# Altium PCB PCB_BaseBoard.PcbDoc
Units mil, origin at the board's own origin, x right, y up, seen from the top; angles counter-clockwise.
Board outline 6000 x 4000 mil, 2 copper layers (Top Layer, Bottom Layer); 82 components, 96 nets, 318 pads, 0 vias.
Unrouted connection lines stored in the file: 197.
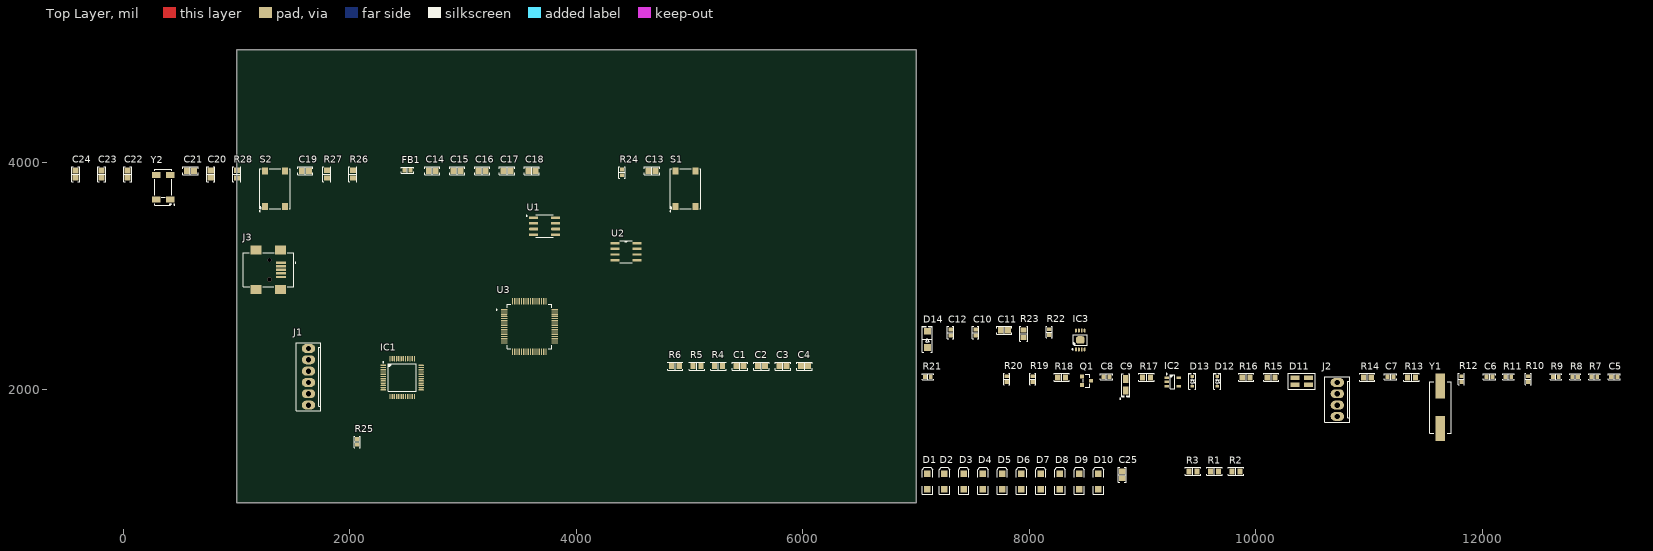
[diagram p0: Top Layer view]
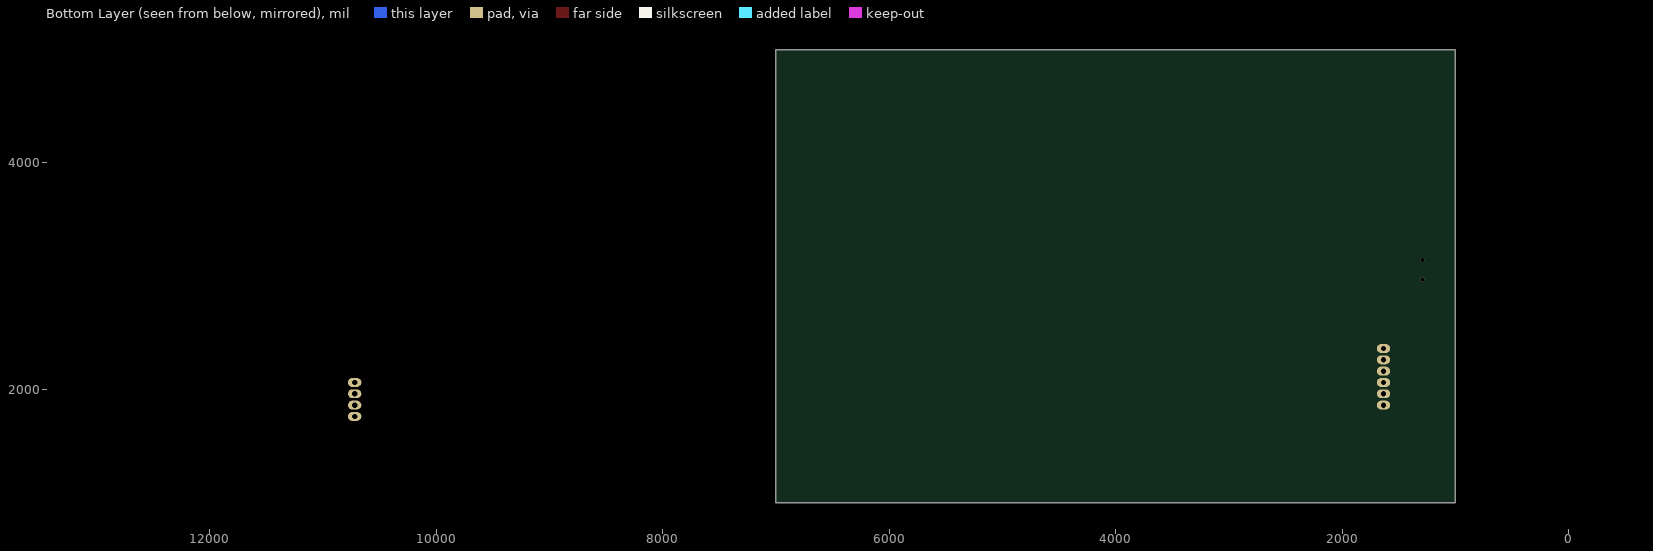
[diagram p1: Bottom Layer view, seen from below]

## Layer stack, top to bottom
Top Solder: solder mask 0.4, Solder Resist, Dk 3.5
Top Layer: signal copper 1.4
Dielectric 1: dielectric 12.6, FR-4, Dk 4.8
Bottom Layer: signal copper 1.4
Bottom Solder: solder mask 0.4, Solder Resist, Dk 3.5

## Board outline
1000,1000 7000,1000 7000,5000 1000,5000

## Design rules (kind name [scope] priority, off if disabled: settings)
Clearance [All] p1: gap=10 ignorepadtopadclearanceinfootprint=FALSE except(0: Arc-Hole Track-Hole SMDPad-Hole THPad-Hole Via-Hole Fill-Hole Poly-Hole Region-Hole Text-Hole)
PolygonConnect [All] p1: connectstyle=Relief reliefconductorwidth=10 reliefentries=4 polygonreliefangle="90 Angle" airgapwidth=10
RoomDefinition Designator_3 [InComponentClass('Designator')] p1: confinementstyle=ConfineIn formatcopy=TRUE lockcomponents=FALSE outline 5476.23,2932.4 11061.23,2932.4 11061.23,3572.4 5476.23,3572.4
RoomDefinition Designator_2 [InComponentClass('Designator')] p2: confinementstyle=ConfineIn formatcopy=TRUE lockcomponents=FALSE outline 985,1000 7005,1000 7005,4995 985,4995
RoomDefinition Designator_1 [InComponentClass('Designator')] p3: confinementstyle=ConfineIn formatcopy=TRUE lockcomponents=FALSE outline 6385,595 11970,595 11970,1235 6385,1235
RoomDefinition Designator [InComponentClass('Designator')] p4: confinementstyle=ConfineIn formatcopy=TRUE lockcomponents=FALSE outline 7215,3890 12800,3890 12800,4530 7215,4530
RoutingVias [All] p1: holewidth=28 width=50 viastyle="Through Hole" minholewidth=28 minwidth=50 maxholewidth=28 maxwidth=50
SolderMaskExpansion [All] p1: expansion=4 istentingtop=FALSE
Width [All] p1: maxlimit=10 minlimit=10 preferedwidth=10
30 further rules are at their usual default settings.

## Classes and differential pairs
net class PF[0..7]: PF0 PF1 PF4 PF5 PF6 PF7
net class PC[0..15]: PC0 PC1 PC2 PC3 PC4 PC5 PC6 PC7 PC8 PC9 PC10 PC11 PC12 PC13 PC14 PC15
net class PB[0..15]: PB0 PB1 PB2 PB3 PB4 PB5 PB6 PB7 PB8 PB9 PB10 PB11 PB12 PB13 PB14 PB15
net class PA[0..15]: PA0 PA1 PA2 PA3 PA4 PA5 PA6 PA7 PA8 PA9 PA10 PA11 PA12 PA13 PA14 PA15
component class Designator: C13 C14 C15 C16 C17 C18 C19 C20 C21 C22 C23 C24 FB1 R24 R25 R26 R27 R28 S1 S2 U3 Y2

## Components (designator, comment, footprint, x,y, rotation, side; value= is the part's Value field where it differs from the comment)
C1 "0.1µF" "CAP 0805_2012" 5445,2205 r0 top
C2 "0.1µF" "CAP 0805_2012" 5635,2205 r0 top
C3 "0.1µF" "CAP 0805_2012" 5825,2205 r0 top
C4 "0.1µF" "CAP 0805_2012" 6015,2205 r0 top
C5 "20pF" "CAP 0603_1608" 13165,2110 r0 top
C6 "20pF" "CAP 0603_1608" 12065,2110 r0 top
C7 "20pF" "CAP 0603_1608" 11190,2110 r0 top
C8 "1µF" "CAP 0603_1608" 8680,2110 r0 top
C9 "4.7µF" "CAP POL 1206_3216" 8850,2040 r90 top
C10 "1µF" "CAP 0603_1608" 7525,2500 r90 top
C11 "0.1µF" "CAP 0805_2012" 7780,2520 r0 top
C12 "1µF" "CAP 0603_1608" 7305,2500 r90 top
C13 "0.1µF" "CAP 0805_2012" 4668,3929.41 r0 top
C14 "0.1µF" "CAP 0805_2012" 2728,3929.41 r0 top
C15 "0.1µF" "CAP 0805_2012" 2948,3929.41 r0 top
C16 "0.1µF" "CAP 0805_2012" 3168,3929.41 r0 top
C17 "0.1µF" "CAP 0805_2012" 3388,3929.41 r0 top
C18 "0.1µF" "CAP 0805_2012" 3608,3929.41 r0 top
C19 "0.1µF" "CAP 0805_2012" 1608,3929.41 r0 top
C20 "4.3pF" "CAP 0805_2012" 773,3899.41 r90 top
C21 "4.7µF" "CAP 0805_2012" 593,3929.41 r0 top
C22 "4.3pF" "CAP 0805_2012" 38,3899.41 r90 top
C23 "2.2µF" "CAP 0805_2012" -192,3899.41 r90 top
C24 "2.2µF" "CAP 0805_2012" -422,3899.41 r90 top
C25 "10000pF" "CAP 0805_2012" 8820,1245 r90 top
D1 "LED2" 3.2X1.6X1.1 7100,1185 r90 top
D2 "LED2" 3.2X1.6X1.1 7250,1185 r90 top
D3 "LED2" 3.2X1.6X1.1 7420,1185 r90 top
D4 "LED2" 3.2X1.6X1.1 7590,1185 r90 top
D5 "LED2" 3.2X1.6X1.1 7760,1185 r90 top
D6 "LED2" 3.2X1.6X1.1 7930,1185 r90 top
D7 "LED2" 3.2X1.6X1.1 8100,1185 r90 top
D8 "LED2" 3.2X1.6X1.1 8270,1185 r90 top
D9 "LED2" 3.2X1.6X1.1 8440,1185 r90 top
D10 "LED2" 3.2X1.6X1.1 8610,1185 r90 top
D11 "APBL3025ESGC-F01" APBL3025ESGC-F01 10405,2100 r0 top
D12 "BAT60JFILM" SOD323 9660,2070 r90 top
D13 "BAT60JFILM" SOD323 9440,2070 r90 top
D14 "Yellow" "LED 1206_3216 YELLOW" 7100,2440 r90 top
FB1 "600 Ohms @ 100MHz" "FER 0603_1608" 2508,3934.41 r0 top
IC1 "STM32F103CBT6" "ST LQFP-48 7X7MM" 2462.68,2103.27 r0 top
IC2 "TPS76338DBVR" "TI SOT-23-5 DBV" 9265,2065 r0 top
IC3 "LT1965EMS8E-3.3#PBF" "LT MSOP-8 MS8E 3X3MM" 8450,2435 r90 top
J1 "0022272061" "MOLEX KK 0022272061" 1635,2110 r90 top
J2 "0022272041" "MOLEX KK 0022272041" 10720,1910 r90 top
J3 "1734035-2" CONN_1734035-2 1290,3055 r270 top
Q1 "MMSS8050-H-TP" "MCCSEMI SOT-23-3" 8505,2075 r0 top
R1 "10 kOhms" "RES 0805_2012" 9635,1275 r0 top
R2 "10 kOhms" "RES 0805_2012" 9825,1275 r0 top
R3 "10 kOhms" "RES 0805_2012" 9445,1275 r0 top
R4 "4.7 kOhms" "RES 0805_2012" 5255,2205 r0 top
R5 "10 kOhms" "RES 0805_2012" 5065,2205 r0 top
R6 "100 Ohms" "RES 0805_2012" 4875,2205 r0 top
R7 "100 kOhms" "RES 0603_1608" 12990,2110 r0 top
R8 "22 Ohms" "RES 0603_1608" 12820,2110 r0 top
R9 "22 Ohms" "RES 0603_1608" 12650,2110 r0 top
R10 "22 Ohms" "RES 0603_1608" 12405,2090 r90 top
R11 "22 Ohms" "RES 0603_1608" 12230,2110 r0 top
R12 "2.7 kOhms" "RES 0603_1608" 11815,2090 r90 top
R13 "4.7 kOhms" "RES 0805_2012" 11375,2105 r0 top
R14 "100 Ohms" "RES 0805_2012" 10985,2105 r0 top
R15 "100 Ohms" "RES 0805_2012" 10135,2105 r0 top
R16 "100 Ohms" "RES 0805_2012" 9915,2105 r0 top
R17 "10 kOhms" "RES 0805_2012" 9035,2105 r0 top
R18 "100 Ohms" "RES 0805_2012" 8285,2105 r0 top
R19 "1.5 kOhms" "RES 0603_1608" 8030,2090 r90 top
R20 "36 kOhms" "RES 0603_1608" 7800,2090 r90 top
R21 "100 kOhms" "RES 0603_1608" 7105,2110 r0 top
R22 "1 kOhms" "RES 0603_1608" 8175,2505 r90 top
R23 "4.7 kOhms" "RES 0805_2012" 7950,2490 r90 top
R24 "Value" "RES 0603_1608" 4403,3914.41 r90 top
R25 "Value" "RES 0603_1608" 2065,1535 r90 top
R26 "10 kOhms" "RES 0805_2012" 2028,3899.41 r90 top
R27 "4.7 kOhms" "RES 0805_2012" 1798,3899.41 r90 top
R28 "100 Ohms" "RES 0805_2012" 1003,3899.41 r90 top
S1 "B3S-1000P" "OMRON B3S-1000P" 4963,3769.41 r90 top
S2 "B3S-1000P" "OMRON B3S-1000P" 1338,3769.41 r90 top
U1 "TMP75CID" SOIC127P599X175-8N 3720,3440 r0 top
U2 "IRF9332PBF" SOIC127P600X175-8N 4438,3215 r0 top
U3 "STM32F072R8T6" QFP50P1200X1200X160-64N 3585,2555 r0 top
Y1 "8MHz" "ABRACON ABLS" 11630,1840 r90 top
Y2 "32.768kHz" "ABRACON ABS25" 353,3784.41 r90 top

## Footprints (in the part's own frame and the unit in brackets; to place one, negate y for a bottom-side part, rotate by r counter-clockwise, add the part's x,y. Pads: shape width x height; smd on the part's side, far side on the other; paste and mask are expansions set on the pad)
3.2X1.6X1.1 [mm] "SMT LED; 2 Flat Leads"
  rect 1.5x1.5 smd: 1(-1.75,0) 2(1.75,0)
  silkscreen extent -2.9,-1.15 3.2,1.15
"ABRACON ABLS" [mm] "Crystal, 2-Leads, Body 4.70x11.40mm, Pitch 8.80mm, IPC Medium Density"
  rect 5.6x2.1 smd: 1(-4.75,0) 2(4.75,0)
  silkscreen extent -5.77,-2.43 5.77,2.43, body extent -6.35,-2.35 6.35,2.35, height 4.2
"ABRACON ABS25" [mm]
  rect 1.3x1.9 smd: 1(-2.75,-1.6) 2(2.75,-1.6) 3(2.75,1.6) 4(-2.75,1.6)
  silkscreen extent -4.02,-2.61 4,1.9, body extent -4,-1.9 4,1.9, height 2.5
APBL3025ESGC-F01 [mm]
  rect 2x1 smd: 1(1.5,0) 2(-1.5,0) 3(1.5,-1.5) 4(-1.5,-1.5)
  silkscreen extent -3,-2.5 3,1
"CAP 0603_1608" [mm] "Chip Capacitor, 2-Leads, Body 1.60x0.80mm, IPC Medium Density"
  rect 0.9x1 smd: 1(-0.675,0) 2(0.675,0)
  silkscreen extent -1.4,-0.7 1.4,0.7, body extent -0.8,-0.41 0.8,0.41, height 0.82
"CAP 0805_2012" [mm] "Chip Capacitor, 2-Leads, Body 2.00x1.20mm, IPC Medium Density"
  rect 1.3x1.4 smd: 1(-0.8,0) 2(0.8,0)
  silkscreen extent -1.7,-0.9 1.7,0.9, body extent -1,-0.64 1,0.64, height 1.26
"CAP POL 1206_3216" [mm] "Molded Capacitor, 2-Leads, Body 3.20x1.6mm, IPC Medium Density"
  rect 1.8x1.23 smd: 1(-1.31,0) 2(1.31,0)
  silkscreen extent -3.22,-0.9 2.5,1.32, body extent -1.72,-0.85 1.71,0.85, height 1.7
CONN_1734035-2 [mm]
  rect 0.5x2.3 smd: 1(-1.6,2.6) 2(-0.8,2.6) 3(0,2.6) 4(0.8,2.6) 5(1.6,2.6)
  rect 2x2.5 smd: S1(-4.45,2.5) S2(4.45,2.5) S3(-4.45,-3) S4(4.45,-3)
  round 0.9 hole 0.9 unplated: ""(-2.2,0) ""(2.2,0)
  silkscreen extent -3.85,-5.9 3.85,5.95
"FER 0603_1608" [mm] "Chip Ferrite, 2-Leads, Body 1.60x0.80mm, IPC Medium Density"
  rect 0.9x1 smd: 1(-0.675,0) 2(0.675,0)
  silkscreen extent -1.4,-0.7 1.4,0.7, body extent -0.8,-0.41 0.8,0.41, height 0.82
"LED 1206_3216 YELLOW" [mm] "Chip Diode, 2-Leads, Body 3.13x1.55mm, IPC Medium Density"
  rect 1.5x1.6 smd: 1(-1.8,0) 2(1.8,0)
  silkscreen extent -2.92,-1.1 2.92,1.1, body extent -1.6,-0.8 1.6,0.8, height 0.9
"LT MSOP-8 MS8E 3X3MM" [mm] "MSOP, 8-Leads, Body 3.00x3.00mm, Pitch 0.65mm, IPC Medium Density"
  oval 0.89x0.42 smd: 1(-2.105,0.975) 2(-2.105,0.325) 3(-2.105,-0.325) 4(-2.105,-0.975) 5(2.105,-0.975) 6(2.105,-0.325) 7(2.105,0.325) 8(2.105,0.975)
  rrect50% 1.68x1.88 smd: 9(0,0)
  silkscreen extent -2.23,-1.55 1.15,1.86, body extent -2.46,-1.5 2.46,1.5, height 0.96
"MCCSEMI SOT-23-3" [mm] "SOT23, 3-Leads, Body 2.92x2.37mm, Pitch 0.95mm, IPC Medium Density"
  rect 0.9x0.8 smd: 1(-1,0.95) 2(-1,-0.95) 3(1,0)
  silkscreen extent -0.7,-1.45 0.7,1.45, body extent -1.16,-1.45 1.16,1.45, height 1.5
"MOLEX KK 0022272041" [mm]
  oval 2x3 hole 1.2: 1(-3.81,0) 2(-1.27,0) 3(1.27,0) 4(3.81,0)
  silkscreen extent -5.08,-2.79 5.08,2.79, body extent -5.08,-2.9 5.08,2.9, height 11.7
"MOLEX KK 0022272061" [mm]
  oval 2x3 hole 1.2: 1(-6.35,0) 2(-3.81,0) 3(-1.27,0) 4(1.27,0) 5(3.81,0) 6(6.35,0)
  silkscreen extent -7.62,-2.79 7.62,2.79, body extent -7.62,-2.9 7.62,2.9, height 11.7
"OMRON B3S-1000P" [mm] "B3S-1000P, 4 Pins, 6.6x6.6x4.3mm, 4.5mm Pitch"
  rect 1.55x1.3 smd: 1(-3.984,2.207) 2(3.966,2.207) 3(-3.984,-2.293) 4(3.966,-2.293)
  silkscreen extent -5.1,-3.45 4.49,3.45, body extent -4.51,-3.34 4.49,3.26, height 4.3
QFP50P1200X1200X160-64N [mm]
  rrect25% 1.47x0.28 smd: 1(-5.67,3.75) 2(-5.67,3.25) 3(-5.67,2.75) 4(-5.67,2.25) 5(-5.67,1.75) 6(-5.67,1.25) 7(-5.67,0.75) 8(-5.67,0.25) 9(-5.67,-0.25) 10(-5.67,-0.75) 11(-5.67,-1.25) 12(-5.67,-1.75) 13(-5.67,-2.25) 14(-5.67,-2.75) 15(-5.67,-3.25) 16(-5.67,-3.75) 33(5.67,-3.75) 34(5.67,-3.25) 35(5.67,-2.75) 36(5.67,-2.25) 37(5.67,-1.75) 38(5.67,-1.25) 39(5.67,-0.75) 40(5.67,-0.25) 41(5.67,0.25) 42(5.67,0.75) 43(5.67,1.25) 44(5.67,1.75) 45(5.67,2.25) 46(5.67,2.75) 47(5.67,3.25) 48(5.67,3.75)
  rrect25% 0.28x1.47 smd: 17(-3.75,-5.67) 18(-3.25,-5.67) 19(-2.75,-5.67) 20(-2.25,-5.67) 21(-1.75,-5.67) 22(-1.25,-5.67) 23(-0.75,-5.67) 24(-0.25,-5.67) 25(0.25,-5.67) 26(0.75,-5.67) 27(1.25,-5.67) 28(1.75,-5.67) 29(2.25,-5.67) 30(2.75,-5.67) 31(3.25,-5.67) 32(3.75,-5.67) 49(3.75,5.67) 50(3.25,5.67) 51(2.75,5.67) 52(2.25,5.67) 53(1.75,5.67) 54(1.25,5.67) 55(0.75,5.67) 56(0.25,5.67) 57(-0.25,5.67) 58(-0.75,5.67) 59(-1.25,5.67) 60(-1.75,5.67) 61(-2.25,5.67) 62(-2.75,5.67) 63(-3.25,5.67) 64(-3.75,5.67)
  silkscreen extent -7.44,-5 5,5
"RES 0603_1608" [mm] "Chip Resistor, 2-Leads, Body 1.60x0.80mm, IPC Medium Density"
  rect 0.85x0.95 smd: 1(-0.65,0) 2(0.65,0)
  silkscreen extent -1.27,-0.7 1.27,0.7, body extent -0.8,-0.4 0.8,0.4, height 0.45
"RES 0805_2012" [mm] "Chip Resistor, 2-Leads, Body 2.00x1.25mm, IPC Medium Density"
  rect 1.15x1.35 smd: 1(-0.875,0) 2(0.875,0)
  silkscreen extent -1.7,-0.9 1.7,0.9, body extent -1,-0.62 1,0.63, height 0.6
SOD323 [mm] "SOD, 2-Leads, Body 1.25x2.50mm, IPC Medium Density"
  rect 0.625x0.83 smd: 1(-1.112,0) 2(1.112,0)
  silkscreen extent -1.78,-0.8 1.78,0.8, body extent -1.36,-0.62 1.36,0.62, height 1.05
SOIC127P599X175-8N [mm]
  rrect25% 1.97x0.6 smd: 1(-2.47,1.905) 2(-2.47,0.635) 3(-2.47,-0.635) 4(-2.47,-1.905) 5(2.47,-1.905) 6(2.47,-0.635) 7(2.47,0.635) 8(2.47,1.905)
  silkscreen extent -4.14,-2.52 1.95,2.52
SOIC127P600X175-8N [mil]
  rect 78x20 smd: 1(-97,75) 2(-97,25) 3(-97,-25) 4(-97,-75) 5(97,-75) 6(97,-25) 7(97,25) 8(97,75)
  silkscreen extent -56,-98 56,98
"ST LQFP-48 7X7MM" [mm] "LQFP, 48-Leads, Body 7.00x7.00mm, Pitch 0.50mm, IPC Medium Density"
  oval 1.2x0.3 smd: 1(-4.25,2.75) 2(-4.25,2.25) 3(-4.25,1.75) 4(-4.25,1.25) 5(-4.25,0.75) 6(-4.25,0.25) 7(-4.25,-0.25) 8(-4.25,-0.75) 9(-4.25,-1.25) 10(-4.25,-1.75) 11(-4.25,-2.25) 12(-4.25,-2.75) 25(4.25,-2.75) 26(4.25,-2.25) 27(4.25,-1.75) 28(4.25,-1.25) 29(4.25,-0.75) 30(4.25,-0.25) 31(4.25,0.25) 32(4.25,0.75) 33(4.25,1.25) 34(4.25,1.75) 35(4.25,2.25) 36(4.25,2.75)
  oval 0.3x1.2 smd: 13(-2.75,-4.25) 14(-2.25,-4.25) 15(-1.75,-4.25) 16(-1.25,-4.25) 17(-0.75,-4.25) 18(-0.25,-4.25) 19(0.25,-4.25) 20(0.75,-4.25) 21(1.25,-4.25) 22(1.75,-4.25) 23(2.25,-4.25) 24(2.75,-4.25) 37(2.75,4.25) 38(2.25,4.25) 39(1.75,4.25) 40(1.25,4.25) 41(0.75,4.25) 42(0.25,4.25) 43(-0.25,4.25) 44(-0.75,4.25) 45(-1.25,4.25) 46(-1.75,4.25) 47(-2.25,4.25) 48(-2.75,4.25)
  silkscreen extent -4.37,-3.1 3.1,3.57, body extent -4.51,-4.51 4.51,4.51, height 1.55
"TI SOT-23-5 DBV" [mm] "SOT23, 5-Leads, Body 2.90x2.80mm, Pitch 0.95mm, IPC Medium Density"
  rect 1x0.55 smd: 1(-1.35,0.95) 2(-1.35,0) 3(-1.35,-0.95) 4(1.35,-0.95) 5(1.35,0.95)
  silkscreen extent -1.47,-1.55 0.5,1.9, body extent -1.44,-1.43 1.39,1.48, height 1.5

## Part data
C1 C2 C3 C4 C11 C13 C14 C15 C16 C17 C18 C19: library part AC0805KKX8R9BB104, "CAP CER 0805 10% X8R 50V 100NF", Device Package="0805 (2012 Metric)", Manufacturer=Yageo, Operating Temperature="-55°C ~ 150°C", Ratings=AEC-Q200, Supplier Part Number 1=311-4624-1-ND, Temperature Coefficient=X8R, Tolerance=±10%, Voltage - Rated=50V, Applications=Automotive, Capacitance=0.1µF, ComponentLink1Description=Datasheet, ComponentLink1URL=http://www.yageo.com/documents/recent/AC0805KKX8R9BB104.pdf, ComponentLink2Description="DigiKey Link", ComponentLink2URL=http://digikey.com/product-detail/en/yageo/AC0805KKX8R9BB104/311-4624-1-ND/9699550, LastUpdated="02/09/2020 01:04:20", Lifecycle Status=Active, Minimum Order=1, Mounting Type="Surface Mount, MLCC", Package / Case="0805 (2012 Metric)", Packaging=TapeAndReel, Part Number=AC0805KKX8R9BB104, Part Status=Active, PartId=14076, Price=0.06, Series=AC, Size / Dimension="0.079\" L x 0.049\" W (2.00mm x 1.25mm)", Supplier 1=DigiKey, Thickness (Max)="0.057\" (1.45mm)"
C5 C6 C7: library part 06033A200FAT2A, "CAP CER 20PF 25V NP0 0603", Device Package="0603 (1608 Metric)", Manufacturer="AVX Corporation", Operating Temperature="-55°C ~ 125°C", Supplier Part Number 1=478-11801-1-ND, Temperature Coefficient="C0G, NP0", Tolerance=±1%, Voltage - Rated=25V, Applications="General Purpose", Capacitance=20pF, ComponentLink1Description=Datasheet, ComponentLink1URL=http://datasheets.avx.com/C0GNP0-Dielectric.pdf, ComponentLink2Description="DigiKey Link", ComponentLink2URL=http://digikey.com/product-detail/en/avx-corporation/06033A200FAT2A/478-11801-1-ND/8573437, LastUpdated="02/09/2020 01:03:34", Lifecycle Status=Active, Minimum Order=1, Mounting Type="Surface Mount, MLCC", Package / Case="0603 (1608 Metric)", Packaging=TapeAndReel, Part Number=06033A200FAT2A, Part Status=Active, PartId=3360, Price=0.10, Series=-, Size / Dimension="0.063\" L x 0.032\" W (1.60mm x 0.81mm)", Supplier 1=DigiKey, Thickness (Max)="0.035\" (0.90mm)"
C8 C10 C12: library part C0603C105K8PACTU, "CAP CER 1UF 10V X5R 0603", Device Package="0603 (1608 Metric)", Manufacturer=KEMET, Operating Temperature="-55°C ~ 85°C", Supplier Part Number 1=399-3118-1-ND, Temperature Coefficient=X5R, Tolerance=±10%, Voltage - Rated=10V, Applications="General Purpose", Capacitance=1µF, ComponentLink1Description=Datasheet, ComponentLink1URL=https://api.kemet.com/component-edge/download/datasheet/C0603C105K8PACTU.pdf, ComponentLink2Description="DigiKey Link", ComponentLink2URL=http://digikey.com/product-detail/en/kemet/C0603C105K8PACTU/399-3118-1-ND/551623, LastUpdated="02/09/2020 01:03:23", Lifecycle Status=Active, Minimum Order=1, Mounting Type="Surface Mount, MLCC", Package / Case="0603 (1608 Metric)", Packaging=TapeAndReel, Part Number=C0603C105K8PACTU, Part Status=Active, PartId=9480, Price=0.01, Series="SMD Comm X5R", Size / Dimension="0.063\" L x 0.031\" W (1.60mm x 0.80mm)", Supplier 1=DigiKey, Thickness (Max)="0.035\" (0.90mm)"
C9: library part T495A475K010ATE1K2, "CAP TANT 4.7UF 10% 10V 1206", Device Package="1206 (3216 Metric)", ESR (Equivalent Series Resistance)="1.2Ohm @ 100kHz", Lifetime @ Temp.="2000 Hrs @ 125°C", Manufacturer=KEMET, Manufacturer Size Code=A, Operating Temperature="-55°C ~ 125°C", Supplier Part Number 1=399-18814-1-ND, Tolerance=±10%, Voltage - Rated=10V, Capacitance=4.7µF, ComponentLink1Description=Datasheet, ComponentLink1URL=https://api.kemet.com/component-edge/download/datasheet/T495A475K010ATE1K2.pdf, ComponentLink2Description="DigiKey Link", ComponentLink2URL=http://digikey.com/product-detail/en/kemet/T495A475K010ATE1K2/399-18814-1-ND/9642349, Features="General Purpose", Height - Seated (Max)="0.071\" (1.80mm)", LastUpdated="02/09/2020 01:15:59", Lifecycle Status=Active, Minimum Order=1, Mounting Type="Surface Mount", Package / Case="1206 (3216 Metric)", Packaging=TapeAndReel, Part Number=T495A475K010ATE1K2, Part Status=Active, PartId=115, Price=0.49, Series=T495, Size / Dimension="0.126\" L x 0.063\" W (3.20mm x 1.60mm)", Supplier 1=DigiKey, Type=Molded
C20 C22: library part 08051A4R3CAT2A, "CAP CER 4.3PF 100V NP0 0805", Device Package="0805 (2012 Metric)", Manufacturer="AVX Corporation", Operating Temperature="-55°C ~ 125°C", Supplier Part Number 1=478-10404-1-ND, Temperature Coefficient="C0G, NP0", Tolerance=±0.25pF, Voltage - Rated=100V, Applications="General Purpose", Capacitance=4.3pF, ComponentLink1Description=Datasheet, ComponentLink1URL=http://datasheets.avx.com/C0GNP0-Dielectric.pdf, ComponentLink2Description="DigiKey Link", ComponentLink2URL=http://digikey.com/product-detail/en/avx-corporation/08051A4R3CAT2A/478-10404-1-ND/6797329, LastUpdated="02/09/2020 01:04:08", Lifecycle Status=Active, Minimum Order=1, Mounting Type="Surface Mount, MLCC", Package / Case="0805 (2012 Metric)", Packaging=TapeAndReel, Part Number=08051A4R3CAT2A, Part Status=Active, PartId=17882, Price=0.04, Series=-, Size / Dimension="0.079\" L x 0.049\" W (2.01mm x 1.25mm)", Supplier 1=DigiKey, Thickness (Max)="0.037\" (0.94mm)"
C21: library part TMK212BBJ475KGHT, "CAP CER 4.7UF 25V X5R 0805", Device Package="0805 (2012 Metric)", Manufacturer="Taiyo Yuden", Operating Temperature="-55°C ~ 85°C", Ratings=AEC-Q200, Supplier Part Number 1=587-3713-1-ND, Temperature Coefficient=X5R, Tolerance=±10%, Voltage - Rated=25V, Applications=Automotive, Capacitance=4.7µF, ComponentLink1Description=Datasheet, ComponentLink1URL=https://www.yuden.co.jp/productdata/catalog/mlcc_all_hq_e.pdf, ComponentLink2Description="DigiKey Link", ComponentLink2URL=http://digikey.com/product-detail/en/taiyo-yuden/TMK212BBJ475KGHT/587-3713-1-ND/4811183, LastUpdated="02/09/2020 01:04:32", Lifecycle Status=Active, Minimum Order=1, Mounting Type="Surface Mount, MLCC", Package / Case="0805 (2012 Metric)", Packaging=TapeAndReel, Part Number=TMK212BBJ475KGHT, Part Status=Active, PartId=8142, Price=0.07, Series=M, Size / Dimension="0.079\" L x 0.049\" W (2.00mm x 1.25mm)", Supplier 1=DigiKey, Thickness (Max)="0.057\" (1.45mm)"
C23 C24: library part CL21F225ZOFNNNE, "CAP CER 2.2UF 16V Y5V 0805", Device Package="0805 (2012 Metric)", Manufacturer="Samsung Electro-Mechanics", Operating Temperature="-30°C ~ 85°C", Supplier Part Number 1=1276-3016-1-ND, Temperature Coefficient="Y5V (F)", Tolerance="-20%, +80%", Voltage - Rated=16V, Applications="General Purpose", Capacitance=2.2µF, ComponentLink1Description=Datasheet, ComponentLink1URL=http://www.samsungsem.com/kr/support/product-search/mlcc/CL21F225ZOFNNNE.jsp, ComponentLink2Description="DigiKey Link", ComponentLink2URL=http://digikey.com/product-detail/en/samsung-electro-mechanics/CL21F225ZOFNNNE/1276-3016-1-ND/3891102, LastUpdated="02/09/2020 01:04:16", Lifecycle Status=Active, Minimum Order=1, Mounting Type="Surface Mount, MLCC", Package / Case="0805 (2012 Metric)", Packaging=TapeAndReel, Part Number=CL21F225ZOFNNNE, Part Status=Active, PartId=15359, Price=0.03, Series=CL, Size / Dimension="0.079\" L x 0.049\" W (2.00mm x 1.25mm)", Supplier 1=DigiKey, Thickness (Max)="0.053\" (1.35mm)"
C25: library part C0805C103K1RECAUTO, "CAP CER 0805 10NF 100V X7R 10%", Device Package="0805 (2012 Metric)", Manufacturer=KEMET, Operating Temperature="-55°C ~ 125°C", Ratings=AEC-Q200, Supplier Part Number 1=399-17889-1-ND, Temperature Coefficient=X7R, Tolerance=±10%, Voltage - Rated=100V, Applications="Automotive, ESD Protection", Capacitance=10000pF, ComponentLink1Description=Datasheet, ComponentLink1URL=https://api.kemet.com/component-edge/download/datasheet/C0805C103K1RECAUTO.pdf, ComponentLink2Description="DigiKey Link", ComponentLink2URL=http://digikey.com/product-detail/en/kemet/C0805C103K1RECAUTO/399-17889-1-ND/8640556, LastUpdated="02/09/2020 01:04:15", Lifecycle Status=Active, Minimum Order=1, Mounting Type="Surface Mount, MLCC", Package / Case="0805 (2012 Metric)", Packaging=TapeAndReel, Part Number=C0805C103K1RECAUTO, Part Status=Active, PartId=15732, Price=0.05, Series="ESD SMD Auto X7R", Size / Dimension="0.079\" L x 0.049\" W (2.00mm x 1.25mm)", Supplier 1=DigiKey, Thickness (Max)="0.035\" (0.88mm)"
D1 D2 D3 D4 D5 D6 D7 D8 D9 D10: "Typical RED, GREEN, YELLOW, AMBER GaAs LED", LatestRevisionDate=17-Jul-2002, LatestRevisionNote="Re-released for DXP Platform.", PackageDescription="SM LED; 2 Flat Leads", PackageReference=3.2X1.6X1.1, PackageVersion=Feb-2002, Published=8-Jun-2000, Publisher="Altium Limited"
D11: "Green, Red 568nm Green, 617nm Red LED Indication - Discrete 2.2V Green, 2V Red 4-SMD, No Lead", Package="SMD-4 Kingbright", Check_prices=https://www.snapeda.com/parts/APBL3025ESGC-F01/Kingbright/view-part/2685601/?ref=eda, Digi-Key_Part_Number=754-1078-1-ND, MF=Kingbright, MP=APBL3025ESGC-F01, Purchase-URL=https://pricing.snapeda.com/search/part/APBL3025ESGC-F01/?ref=eda, SnapEDA_Link=https://www.snapeda.com/parts/APBL3025ESGC-F01/Kingbright/view-part/2685601/?ref=snap
D12 D13: "DIODE SCHOTTKY 10V 3A SOD323", Current - Average Rectified (Io)="3A (DC)", Current - Reverse Leakage @ Vr="6µA @ 10V", Manufacturer=STMicroelectronics, Operating Temperature - Junction="150°C (Max)", Package / Case="SC-76, SOD-323", Supplier Device Package=SOD-323, Supplier Part Number 1=497-3707-1-ND, Voltage - DC Reverse (Vr) (Max)=10V, Voltage - Forward (Vf) (Max) @ If="580mV @ 1A", ComponentLink1Description=Datasheet, ComponentLink1URL=http://www.st.com/content/ccc/resource/technical/document/datasheet/3d/d2/27/1d/20/e3/4d/48/CD00001944.pdf/files/CD00001944.pdf/jcr:content/translations/en.CD00001944.pdf, ComponentLink2Description="DigiKey Link", ComponentLink2URL=http://digikey.com/product-detail/en/stmicroelectronics/BAT60JFILM/497-3707-1-ND/686425, Diode Type=Schottky, LastUpdated="02/09/2020 01:27:27", Lifecycle Status=Active, Minimum Order=1, Mounting Type="Surface Mount", Packaging=TapeAndReel, Part Number=BAT60JFILM, Part Status=Active, PartId=3091, Price=0.05, Series=-, Speed="Fast Recovery =< 500ns, > 200mA (Io)", Supplier 1=DigiKey
D14: library part 5990240007F, "LED YELLOW 1206 SMD", Current - Test=20mA, Device Package="1206 (3216 Metric)", Lens Color=0.80mm, Manufacturer=Dialight, Millicandela Rating=126mcd, Supplier Device Package=1206, Supplier Part Number 1=350-4363-1-ND, Voltage - Forward (Vf) (Typ)=2.1V, Color=Yellow, ComponentLink1Description=Datasheet, ComponentLink1URL=http://www.dialightsignalsandcomponents.com/Assets/Brochures_And_Catalogs/Indication/CBI_SMD_new/Dialight_CBI_data_599-1206_Apr2018.pdf, ComponentLink2Description="DigiKey Link", ComponentLink2URL=http://digikey.com/product-detail/en/dialight/5990240007F/350-4363-1-ND/9385469, Configuration=Standard, Height (Max)=0.80mm, LastUpdated="02/09/2020 01:21:26", Lens Size="2.00mm x 1.60mm", Lens Style="Rectangle with Flat Top", Lifecycle Status=Active, Minimum Order=1, Mounting Type="Surface Mount", Package / Case="1206 (3216 Metric)", Packaging=TapeAndReel, Part Number=5990240007F, Part Status=Active, PartId=1, Price=0.07, Series=599, Size / Dimension="3.20mm L x 1.60mm W", Supplier 1=DigiKey, Viewing Angle=140°, Wavelength - Dominant=590nm
FB1: library part BLM18DN601SZ1D, "FERRITEBEAD SMD Z100MHZ=600OHM 7", Current Rating (Max)=700mA, Device Package="0603 (1608 Metric)", Manufacturer="Murata Electronics", Operating Temperature="-55°C ~ 125°C", Ratings=AEC-Q200, Supplier Part Number 1=490-18575-1-ND, ComponentLink1Description=Datasheet, ComponentLink1URL=https://www.murata.com/en-us/api/pdfdownloadapi?cate=luNoiseSupprFilteChipFerriBead&partno=BLM18DN601SZ1%23, ComponentLink2Description="DigiKey Link", ComponentLink2URL=http://digikey.com/product-detail/en/murata-electronics/BLM18DN601SZ1D/490-18575-1-ND/10135586, Height (Max)="0.037\" (0.95mm)", Impedance @ Frequency="600 Ohms @ 100MHz", LastUpdated="02/09/2020 01:18:18", Lifecycle Status=Active, Minimum Order=1, Mounting Type="Surface Mount", Number of Lines=1, Package / Case="0603 (1608 Metric)", Packaging=TapeAndReel, Part Number=BLM18DN601SZ1D, Part Status=Active, PartId=783, Price=0.05, Series="EMIFIL®, BLM18", Size / Dimension="0.063\" L x 0.031\" W (1.60mm x 0.80mm)", Supplier 1=DigiKey
IC1: "IC MCU 32BIT 128KB FLASH 48LQFP", Device Package=48-LQFP, Manufacturer=STMicroelectronics, Operating Temperature="-40°C ~ 85°C (TA)", Supplier Part Number 1=497-6288-ND, Voltage - Supply (Vcc/Vdd)="2V ~ 3.6V", ComponentLink1Description=Datasheet, ComponentLink1URL=https://www.st.com/resource/en/datasheet/stm32f103cb.pdf, ComponentLink2Description="DigiKey Link", ComponentLink2URL=http://digikey.com/product-detail/en/stmicroelectronics/STM32F103CBT6/497-6288-ND/1754420, Connectivity="CANbus, I²C, IrDA, LINbus, SPI, UART/USART, USB", Core Processor="ARM® Cortex®-M3", Core Size=32-Bit, Data Converters="A/D 10x12b", LastUpdated="24/05/2020 22:49:18", Lifecycle Status=Active, Minimum Order=1, Mounting Type="Surface Mount", Number of I/O=37, Oscillator Type=Internal, Package / Case=48-LQFP, Packaging=Tray, Part Number=STM32F103CBT6, Part Status=Active, PartId=194, Peripherals="DMA, Motor Control PWM, PDR, POR, PVD, PWM, Temp Sensor, WDT", Price=5.25, Program Memory Size="128KB (128K x 8)", Program Memory Type=FLASH, RAM Size="20K x 8", Series=STM32F1, Speed=72MHz, Supplier 1=DigiKey
IC2: "IC REG LINEAR 3.8V 150MA SOT23-5", Current - Output=150mA, Current - Quiescent (Iq)=100µA, Current - Supply (Max)=140µA, Manufacturer="Texas Instruments", Operating Temperature="-40°C ~ 125°C", Package / Case="SC-74A, SOT-753", Supplier Device Package=SOT-23-5, Supplier Part Number 1=296-11022-1-ND, Voltage - Input (Max)=10V, Voltage - Output (Min/Fixed)=3.8V, ComponentLink1Description=Datasheet, ComponentLink1URL=http://www.ti.com/general/docs/suppproductinfo.tsp?distId=10&gotoUrl=http%3A%2F%2Fwww.ti.com%2Flit%2Fgpn%2Ftps763, ComponentLink2Description="DigiKey Link", ComponentLink2URL=http://digikey.com/product-detail/en/texas-instruments/TPS76338DBVR/296-11022-1-ND/381505, Control Features=Enable, LastUpdated="02/09/2020 01:24:38", Lifecycle Status=Active, Minimum Order=1, Mounting Type="Surface Mount", Number of Regulators=1, Output Configuration=Positive, Output Type=Fixed, Packaging=TapeAndReel, Part Number=TPS76338DBVR, Part Status=Active, Price=0.33, Protection Features="Over Current, Over Temperature, Reverse Polarity", PSRR="60dB (1kHz)", Series=-, Supplier 1=DigiKey
IC3: "IC REG LINEAR 3.3V 1.1A 8MSOP", Current - Output=1.1A, Current - Quiescent (Iq)=1.1mA, Current - Supply (Max)=40mA, Manufacturer="Linear Technology/Analog Devices", Operating Temperature="-40°C ~ 125°C", Package / Case="8-TSSOP, 8-MSOP (0.118\", 3.00mm Width) Exposed Pad", Supplier Device Package=8-MSOP-EP, Supplier Part Number 1=LT1965EMS8E-3.3#PBF-ND, Voltage - Input (Max)=20V, Voltage - Output (Min/Fixed)=3.3V, Voltage Dropout (Max)="0.49V @ 1.1A", ComponentLink1Description=Datasheet, ComponentLink1URL=http://www.linear.com/docs/25320, ComponentLink2Description="DigiKey Link", ComponentLink2URL=http://digikey.com/product-detail/en/linear-technology-analog-devices/LT1965EMS8E-3.3-PBF/LT1965EMS8E-3.3-PBF-ND/2074395, Control Features=Enable, LastUpdated="02/09/2020 01:24:49", Lifecycle Status=Active, Minimum Order=1, Mounting Type="Surface Mount", Number of Regulators=1, Output Configuration=Positive, Output Type=Fixed, Packaging=Tube, Part Number=LT1965EMS8E-3.3#PBF, Part Status=Active, Price=4.83, Protection Features="Over Current, Over Temperature, Reverse Polarity", PSRR="75dB (120Hz)", Series=-, Supplier 1=DigiKey
J1: "CONN HEADER VERT 6POS 2.54MM", Insulation Color=Natural, Manufacturer=Molex, Material Flammability Rating="UL94 V-0", Supplier Part Number 1=WM4115-ND, ComponentLink1Description=Datasheet, ComponentLink1URL=https://www.molex.com/pdm_docs/sd/022272061_sd.pdf, ComponentLink2Description="DigiKey Link", ComponentLink2URL=http://digikey.com/product-detail/en/molex/0022272061/WM4115-ND/1130581, Connector Type=Header, Contact Finish - Mating=Tin, Contact Finish - Post=Tin, Contact Finish Thickness - Mating="100.0µin (2.54µm)", Contact Length - Mating="0.295\" (7.49mm)", Contact Length - Post="0.140\" (3.56mm)", Contact Material=Brass, Contact Shape=Square, Contact Type="Male Pin", Fastening Type="Friction Lock", Insulation Height="0.461\" (11.70mm)", Insulation Material="Polyamide (PA), Nylon", LastUpdated="12/01/2020 23:52:24", Lifecycle Status=Active, Minimum Order=1, Mounting Type="Through Hole", Number of Positions=6, Number of Positions Loaded=All, Number of Rows=1, Overall Contact Length="0.560\" (14.22mm)", Packaging=Bulk, Part Number=0022272061, Part Status=Active, PartId=80, Pitch - Mating="0.100\" (2.54mm)", Price=0.49, Series="KK 6410", Shrouding="Shrouded - 1 Wall", Style="Board to Cable/Wire", Supplier 1=DigiKey, Termination=Solder
J2: "CONN HEADER VERT 4POS 2.54MM", Insulation Color=Natural, Manufacturer=Molex, Material Flammability Rating="UL94 V-0", Supplier Part Number 1=WM4113-ND, ComponentLink1Description=Datasheet, ComponentLink1URL=https://www.molex.com/pdm_docs/sd/022272041_sd.pdf, ComponentLink2Description="DigiKey Link", ComponentLink2URL=http://digikey.com/product-detail/en/molex/0022272041/WM4113-ND/1130579, Connector Type=Header, Contact Finish - Mating=Tin, Contact Finish - Post=Tin, Contact Finish Thickness - Mating="100.0µin (2.54µm)", Contact Length - Mating="0.295\" (7.49mm)", Contact Length - Post="0.140\" (3.56mm)", Contact Material=Brass, Contact Shape=Square, Contact Type="Male Pin", Fastening Type="Friction Lock", Insulation Height="0.461\" (11.70mm)", Insulation Material="Polyamide (PA), Nylon", LastUpdated="12/01/2020 23:52:05", Lifecycle Status=Active, Minimum Order=1, Mounting Type="Through Hole", Number of Positions=4, Number of Positions Loaded=All, Number of Rows=1, Overall Contact Length="0.560\" (14.22mm)", Packaging=Bulk, Part Number=0022272041, Part Status=Active, PartId=78, Pitch - Mating="0.100\" (2.54mm)", Price=0.40, Series="KK 6410", Shrouding="Shrouded - 1 Wall", Style="Board to Cable/Wire", Supplier 1=DigiKey, Termination=Solder
J3: "Conn Mini USB 2.0 Type B RCP 5 POS 0.8mm Solder RA SMD 5 Terminal 1 Port Automotive T/R", Package=None, Availability=Unavailable, Centerline_Pitch=".8 mm[.031 in]", EU_RoHS_Compliance=Compliant, MF="TE Connectivity", MP=1734035-2, Number_of_Positions=5, Price=None, Product_Type=Connector, SnapEDA_Link=https://www.snapeda.com/parts/1734035-2/TE%20Connectivity%20AMP%20Connectors/view-part/551725/?ref=snap, TE_purchase_URL=https://www.te.com/usa-en/product-1734035-2.html?te_bu=Cor&te_type=disp&te_campaign=seda_glo_cor-seda-global-disp-prtnr-fy19-seda-model-bom-cta_sma-317_1&elqCampaignId=32493
Q1: "TRANS NPN 25V 1.5A SOT23", Current - Collector (Ic) (Max)=1.5A, Current - Collector Cutoff (Max)=100nA, DC Current Gain (hFE) (Min) @ Ic, Vce="120 @ 100mA, 1V", Frequency - Transition=100MHz, Manufacturer="Micro Commercial Co", Operating Temperature="-55°C ~ 150°C (TJ)", Package / Case="TO-236-3, SC-59, SOT-23-3", Power - Max=625mW, Supplier Device Package=SOT-23, Supplier Part Number 1=MMSS8050-H-TPMSCT-ND, Voltage - Collector Emitter Breakdown (Max)=25V, ComponentLink1Description=Datasheet, ComponentLink1URL=https://www.mccsemi.com/pdf/Products/MMSS8050(SOT-23).pdf, ComponentLink2Description="DigiKey Link", ComponentLink2URL=http://digikey.com/product-detail/en/micro-commercial-co/MMSS8050-H-TP/MMSS8050-H-TPMSCT-ND/2825945, LastUpdated="02/09/2020 01:30:10", Lifecycle Status=Active, Minimum Order=1, Mounting Type="Surface Mount", Packaging=TapeAndReel, Part Number=MMSS8050-H-TP, Part Status=Active, PartId=279, Price=0.03, Series=-, Supplier 1=DigiKey, Transistor Type=NPN, Vce Saturation (Max) @ Ib, Ic="500mV @ 80mA, 800mA"
R1 R2 R3 R5 R17 R26: library part CPF0805B10KE, "RES SMD 10K OHM 0.1% 1/10W 0805", Device Package="0805 (2012 Metric)", Manufacturer="TE Connectivity Passive Product", Operating Temperature="-55°C ~ 155°C", Power (Watts)="0.1W, 1/10W", Supplier Device Package=0805, Supplier Part Number 1=A106043CT-ND, Temperature Coefficient=±25ppm/°C, Tolerance=±0.1%, ComponentLink1Description=Datasheet, ComponentLink1URL=https://www.te.com/commerce/DocumentDelivery/DDEController?Action=srchrtrv&DocNm=1773200&DocType=DS&DocLang=English, ComponentLink2Description="DigiKey Link", ComponentLink2URL=http://digikey.com/product-detail/en/te-connectivity-passive-product/CPF0805B10KE/A106043CT-ND/3477679, Composition="Thin Film", Height - Seated (Max)="0.026\" (0.65mm)", LastUpdated="02/09/2020 01:15:24", Lifecycle Status=Active, Minimum Order=1, Number of Terminations=2, Package / Case="0805 (2012 Metric)", Packaging=TapeAndReel, Part Number=CPF0805B10KE, Part Status=Active, PartId=27724, Price=0.09, Resistance="10 kOhms", Series="CPF, Neohm", Size / Dimension="0.079\" L x 0.049\" W (2.00mm x 1.25mm)", Supplier 1=DigiKey
R4 R13 R23 R27: library part CRCW08054K70JNTA, "RES SMD 4.7K OHM 5% 1/8W 0805", Device Package="0805 (2012 Metric)", Manufacturer="Vishay Dale", Operating Temperature="-55°C ~ 155°C", Power (Watts)="0.125W, 1/8W", Ratings=AEC-Q200, Supplier Device Package=0805, Supplier Part Number 1=541-3029-1-ND, Temperature Coefficient=±200ppm/°C, Tolerance=±5%, ComponentLink1Description=Datasheet, ComponentLink1URL=http://www.vishay.com/docs/20008/dcrcw.pdf, ComponentLink2Description="DigiKey Link", ComponentLink2URL=http://digikey.com/product-detail/en/vishay-dale/CRCW08054K70JNTA/541-3029-1-ND/6073672, Composition="Thick Film", Features="Automotive AEC-Q200", Height - Seated (Max)="0.020\" (0.50mm)", LastUpdated="02/09/2020 01:15:17", Lifecycle Status=Active, Minimum Order=1, Number of Terminations=2, Package / Case="0805 (2012 Metric)", Packaging=TapeAndReel, Part Number=CRCW08054K70JNTA, Part Status=Active, PartId=30842, Price=0.01, Resistance="4.7 kOhms", Series=CRCW, Size / Dimension="0.079\" L x 0.049\" W (2.00mm x 1.25mm)", Supplier 1=DigiKey
R6 R14 R15 R16 R18 R28: library part CRCW0805100RFKEB, "RES SMD 100 OHM 1% 1/8W 0805", Device Package="0805 (2012 Metric)", Manufacturer="Vishay Dale", Operating Temperature="-55°C ~ 155°C", Power (Watts)="0.125W, 1/8W", Ratings=AEC-Q200, Supplier Device Package=0805, Supplier Part Number 1=541-CRCW0805100RFKEBCT-ND, Temperature Coefficient=±100ppm/°C, Tolerance=±1%, ComponentLink1Description=Datasheet, ComponentLink1URL=http://www.vishay.com/docs/20035/dcrcwe3.pdf, ComponentLink2Description="DigiKey Link", ComponentLink2URL=http://digikey.com/product-detail/en/vishay-dale/CRCW0805100RFKEB/541-CRCW0805100RFKEBCT-ND/11501183, Composition="Thick Film", Features="Automotive AEC-Q200", LastUpdated="02/09/2020 01:14:22", Lifecycle Status=Active, Minimum Order=1, Number of Terminations=2, Package / Case="0805 (2012 Metric)", Packaging=TapeAndReel, Part Number=CRCW0805100RFKEB, PartId=57124, Price=0.01, Resistance="100 Ohms", Series=CRCW, Supplier 1=DigiKey
R7 R21: library part RCS0603100KFKEA, "RES SMD 100K OHM 1% 1/4W 0603", Device Package="0603 (1608 Metric)", Manufacturer="Vishay Dale", Operating Temperature="-55°C ~ 155°C", Power (Watts)="0.25W, 1/4W", Ratings=AEC-Q200, Supplier Device Package=0603, Supplier Part Number 1=541-2800-1-ND, Temperature Coefficient=±100ppm/°C, Tolerance=±1%, ComponentLink1Description=Datasheet, ComponentLink1URL=http://www.vishay.com/docs/20065/rcse3.pdf, ComponentLink2Description="DigiKey Link", ComponentLink2URL=http://digikey.com/product-detail/en/vishay-dale/RCS0603100KFKEA/541-2800-1-ND/5867093, Composition="Thick Film", Features="Automotive AEC-Q200, Pulse Withstanding", Height - Seated (Max)="0.020\" (0.50mm)", LastUpdated="02/09/2020 01:10:24", Lifecycle Status=Active, Minimum Order=1, Number of Terminations=2, Package / Case="0603 (1608 Metric)", Packaging=TapeAndReel, Part Number=RCS0603100KFKEA, Part Status=Active, PartId=5363, Price=0.02, Resistance="100 kOhms", Series="RCS e3", Size / Dimension="0.061\" L x 0.033\" W (1.55mm x 0.85mm)", Supplier 1=DigiKey
R8 R9 R10 R11: library part RR0816Q-220-D, "RES SMD 22 OHM 0.5% 1/16W 0603", Device Package="0603 (1608 Metric)", Manufacturer=Susumu, Operating Temperature="-55°C ~ 125°C", Power (Watts)="0.063W, 1/16W", Supplier Device Package=0603, Supplier Part Number 1=RR08Q22DCT-ND, Temperature Coefficient=±50ppm/°C, Tolerance=±0.5%, ComponentLink1Description=Datasheet, ComponentLink1URL=http://www.susumu.co.jp/common/pdf/n_catalog_partition05_en.pdf, ComponentLink2Description="DigiKey Link", ComponentLink2URL=http://digikey.com/product-detail/en/susumu/RR0816Q-220-D/RR08Q22DCT-ND/432685, Composition="Thin Film", Height - Seated (Max)="0.020\" (0.50mm)", LastUpdated="02/09/2020 01:09:59", Lifecycle Status=Active, Minimum Order=1, Number of Terminations=2, Package / Case="0603 (1608 Metric)", Packaging=TapeAndReel, Part Number=RR0816Q-220-D, Part Status=Active, PartId=16924, Price=0.01, Resistance="22 Ohms", Series=RR, Size / Dimension="0.063\" L x 0.031\" W (1.60mm x 0.80mm)", Supplier 1=DigiKey
R12: library part CRCW06032K70FKEAHP, "RES SMD 2.7K OHM 1% 1/4W 0603", Device Package="0603 (1608 Metric)", Manufacturer="Vishay Dale", Operating Temperature="-55°C ~ 155°C", Power (Watts)="0.25W, 1/4W", Ratings=AEC-Q200, Supplier Device Package=0603, Supplier Part Number 1=541-2.70KSCT-ND, Temperature Coefficient=±100ppm/°C, Tolerance=±1%, ComponentLink1Description=Datasheet, ComponentLink1URL=http://www.vishay.com/docs/20043/crcwhpe3.pdf, ComponentLink2Description="DigiKey Link", ComponentLink2URL=http://digikey.com/product-detail/en/vishay-dale/CRCW06032K70FKEAHP/541-2.70KSCT-ND/3533454, Composition="Thick Film", Features="Automotive AEC-Q200, Pulse Withstanding", Height - Seated (Max)="0.022\" (0.55mm)", LastUpdated="02/09/2020 01:10:04", Lifecycle Status=Active, Minimum Order=1, Number of Terminations=2, Package / Case="0603 (1608 Metric)", Packaging=TapeAndReel, Part Number=CRCW06032K70FKEAHP, Part Status=Active, PartId=14726, Price=0.02, Resistance="2.7 kOhms", Series=CRCW-HP, Size / Dimension="0.063\" L x 0.033\" W (1.60mm x 0.85mm)", Supplier 1=DigiKey
R19: library part RT0603FRE071K5L, "RES SMD 1.5K OHM 1% 1/10W 0603", Device Package="0603 (1608 Metric)", Manufacturer=Yageo, Operating Temperature="-55°C ~ 155°C", Power (Watts)="0.1W, 1/10W", Supplier Device Package=0603, Supplier Part Number 1=YAG2322CT-ND, Temperature Coefficient=±50ppm/°C, Tolerance=±1%, ComponentLink1Description=Datasheet, ComponentLink1URL=https://www.yageo.com/upload/media/product/productsearch/datasheet/rchip/PYu-RT_1-to-0.01_RoHS_L_11.pdf, ComponentLink2Description="DigiKey Link", ComponentLink2URL=http://digikey.com/product-detail/en/yageo/RT0603FRE071K5L/YAG2322CT-ND/5252436, Composition="Thin Film", Height - Seated (Max)="0.022\" (0.55mm)", LastUpdated="02/09/2020 01:09:47", Lifecycle Status=Active, Minimum Order=1, Number of Terminations=2, Package / Case="0603 (1608 Metric)", Packaging=TapeAndReel, Part Number=RT0603FRE071K5L, Part Status=Active, PartId=22280, Price=0.01, Resistance="1.5 kOhms", Series=RT, Size / Dimension="0.063\" L x 0.031\" W (1.60mm x 0.80mm)", Supplier 1=DigiKey
R20: library part CR0603-FX-3602ELF, "RES SMD 36K OHM 1% 1/10W 0603", Device Package="0603 (1608 Metric)", Manufacturer="Bourns Inc.", Operating Temperature="-55°C ~ 155°C", Power (Watts)="0.1W, 1/10W", Supplier Device Package=0603, Supplier Part Number 1=CR0603-FX-3602ELFCT-ND, Temperature Coefficient=±100ppm/°C, Tolerance=±1%, ComponentLink1Description=Datasheet, ComponentLink1URL=https://www.bourns.com/docs/Product-Datasheets/CHPREZTR.pdf, ComponentLink2Description="DigiKey Link", ComponentLink2URL=http://digikey.com/product-detail/en/bourns-inc/CR0603-FX-3602ELF/CR0603-FX-3602ELFCT-ND/8602032, Composition="Thick Film", Features="Moisture Resistant", Height - Seated (Max)="0.022\" (0.55mm)", LastUpdated="02/09/2020 01:10:22", Lifecycle Status=Active, Minimum Order=1, Number of Terminations=2, Package / Case="0603 (1608 Metric)", Packaging=TapeAndReel, Part Number=CR0603-FX-3602ELF, Part Status=Active, PartId=6440, Price=0.01, Resistance="36 kOhms", Series=CR0603, Size / Dimension="0.063\" L x 0.031\" W (1.60mm x 0.80mm)", Supplier 1=DigiKey
R22: library part RT0603FRE071KL, "RES SMD 1K OHM 1% 1/10W 0603", Device Package="0603 (1608 Metric)", Manufacturer=Yageo, Operating Temperature="-55°C ~ 155°C", Power (Watts)="0.1W, 1/10W", Supplier Device Package=0603, Supplier Part Number 1=YAG2323CT-ND, Temperature Coefficient=±50ppm/°C, Tolerance=±1%, ComponentLink1Description=Datasheet, ComponentLink1URL=https://www.yageo.com/upload/media/product/productsearch/datasheet/rchip/PYu-RT_1-to-0.01_RoHS_L_11.pdf, ComponentLink2Description="DigiKey Link", ComponentLink2URL=http://digikey.com/product-detail/en/yageo/RT0603FRE071KL/YAG2323CT-ND/5252437, Composition="Thin Film", Height - Seated (Max)="0.022\" (0.55mm)", LastUpdated="02/09/2020 01:10:23", Lifecycle Status=Active, Minimum Order=1, Number of Terminations=2, Package / Case="0603 (1608 Metric)", Packaging=TapeAndReel, Part Number=RT0603FRE071KL, Part Status=Active, PartId=5672, Price=0.01, Resistance="1 kOhms", Series=RT, Size / Dimension="0.063\" L x 0.031\" W (1.60mm x 0.80mm)", Supplier 1=DigiKey
R24 R25: library part RCA06030000ZSEA, "RES SMD 0 OHM JUMPER 1/10W 0603", Device Package="0603 (1608 Metric)", Manufacturer="Vishay Dale", Operating Temperature="-55°C ~ 155°C", Power (Watts)="0.1W, 1/10W", Ratings=AEC-Q200, Supplier Device Package=0603, Supplier Part Number 1=541-2192-1-ND, Tolerance=Jumper, ComponentLink1Description=Datasheet, ComponentLink1URL=http://www.vishay.com/docs/20037/rcae3.pdf, ComponentLink2Description="DigiKey Link", ComponentLink2URL=http://digikey.com/product-detail/en/vishay-dale/RCA06030000ZSEA/541-2192-1-ND/4946845, Composition="Thick Film", Features="Anti-Sulfur, Automotive AEC-Q200", Height - Seated (Max)="0.020\" (0.50mm)", LastUpdated="02/09/2020 01:10:23", Lifecycle Status=Active, Minimum Order=1, Number of Terminations=2, Package / Case="0603 (1608 Metric)", Packaging=TapeAndReel, Part Number=RCA06030000ZSEA, Part Status=Active, PartId=5740, Price=0.01, Series=RCA, Size / Dimension="0.061\" L x 0.033\" W (1.55mm x 0.85mm)", Supplier 1=DigiKey
S1 S2: "SWITCH TACTILE SPST-NO 0.05A 24V", Contact Rating @ Voltage="0.05A @ 24VDC", Manufacturer="Omron Electronics Inc-EMC Div", Operating Force=160gf, Operating Temperature="-25°C ~ 70°C", Supplier Part Number 1=SW836CT-ND, Actuator Height off PCB, Vertical=4.30mm, Actuator Orientation="Top Actuated", Actuator Type=Standard, Circuit=SPST-NO, ComponentLink1Description=Datasheet, ComponentLink1URL=https://omronfs.omron.com/en_US/ecb/products/pdf/en-b3s.pdf, ComponentLink2Description="DigiKey Link", ComponentLink2URL=http://digikey.com/product-detail/en/omron-electronics-inc-emc-div/B3S-1000P/SW836CT-ND/700012, Features="Sealed - Fully", Illumination=Non-Illuminated, Ingress Protection="IP67 - Dust Tight, Waterproof", LastUpdated="09/04/2020 09:57:13", Lifecycle Status=Active, Minimum Order=1, Mounting Type="Surface Mount", Outline="6.60mm x 6.00mm", Packaging=TapeAndReel, Part Number=B3S-1000P, Part Status=Active, Price=0.39, Series=B3S, Supplier 1=DigiKey, Switch Function=Off-Mom, Termination Style="Gull Wing"
U1: Package=None, Availability=Unavailable, MP=TMP75CID, Price=None
U2: "HEXFET Power MOSFET", Package=None, Availability=Unavailable, MP=IRF9332PBF, Price=None
U3: "ARMÂ® CortexÂ®-M0 STM32F0 Microcontroller IC 32-Bit 48MHz 64KB _64K x 8_ FLASH 64-LQFP _10x10_", Package="LQFP-64 STMicroelectronics", Availability=Unavailable, MF=STMicroelectronics, MP=STM32F072R8T6, Price=None, SnapEDA_Link=https://www.snapeda.com/parts/STM32F072R8T6/STMicroelectronics/view-part/226402/?ref=snap
Y1: library part ABLS-8.000MHZ-B2-T, "CRYSTAL 8.0000MHZ 18PF SMD", ESR (Equivalent Series Resistance)="80 Ohms", Frequency Stability=±50ppm, Frequency Tolerance=±20ppm, Load Capacitance=18pF, Manufacturer="Abracon LLC", Operating Mode=Fundamental, Operating Temperature="-20°C ~ 70°C", Package / Case=HC-49/US, Supplier Part Number 1=535-9089-1-ND, ComponentLink1Description=Datasheet, ComponentLink1URL=https://abracon.com/Resonators/abls.pdf, ComponentLink2Description="DigiKey Link", ComponentLink2URL=http://digikey.com/product-detail/en/abracon-llc/ABLS-8.000MHZ-B2-T/535-9089-1-ND/675606, Frequency=8MHz, Height - Seated (Max)="0.165\" (4.20mm)", LastUpdated="02/09/2020 01:21:45", Lifecycle Status=Active, Minimum Order=1, Mounting Type="Surface Mount", Packaging=TapeAndReel, Part Number=ABLS-8.000MHZ-B2-T, Part Status=Active, PartId=133, Price=0.24, Series=ABLS, Size / Dimension="0.449\" L x 0.185\" W (11.40mm x 4.70mm)", Supplier 1=DigiKey, Type="MHz Crystal"
Y2: library part ABS25-32.768KHZ-6-T, "CRYSTAL 32.7680KHZ 6PF SMD", ESR (Equivalent Series Resistance)="50 kOhms", Frequency Tolerance=±20ppm, Load Capacitance=6pF, Manufacturer="Abracon LLC", Operating Mode=Fundamental, Operating Temperature="-40°C ~ 85°C", Package / Case="4-SOJ, 5.50mm pitch", Supplier Part Number 1=535-10240-1-ND, ComponentLink1Description=Datasheet, ComponentLink1URL=https://abracon.com/Resonators/abs25.pdf, ComponentLink2Description="DigiKey Link", ComponentLink2URL=http://digikey.com/product-detail/en/abracon-llc/ABS25-32.768KHZ-6-T/535-10240-1-ND/2218053, Frequency=32.768kHz, Height - Seated (Max)="0.098\" (2.50mm)", LastUpdated="02/09/2020 01:21:47", Lifecycle Status=Active, Minimum Order=1, Mounting Type="Surface Mount", Packaging=TapeAndReel, Part Number=ABS25-32.768KHZ-6-T, Part Status=Active, PartId=395, Price=0.42, Series=ABS25, Size / Dimension="0.315\" L x 0.150\" W (8.00mm x 3.80mm)", Supplier 1=DigiKey, Type="kHz Crystal (Tuning Fork)"

## Nets (pads, with @x,y where several pads share a name; then routed paths per layer and width w, separated by ;. In a path a pad name is that pad's centre, name@x,y a point inside that pad or via, vN(x,y) a via of type N, cw(c..) or ccw(c..) an arc to the next point about the centre after c; other vN are vias at no path point)
3P3: R4.1
+5V: C12.1 IC3.7 IC3.8 R22.2 U2.5 U2.6 U2.7 U2.8
AGND: C14.1 R25.2 U3.12
AIN1: IC1.10 R4.2
BOOT0: R26.2 U3.60
GND: C1.1 C2.1 C3.1 C4.1 C5.1 C6.1 C7.1 C8.2 C9.2 C10.2 C11.2 C12.2 C13.2 C15.1 C16.1 C17.1 C18.1 C20.2 C21.1 C22.2 C23.1 C23.2 C24.1 C24.2 C25.1 D1.2 D2.2 D3.2 D4.2 D5.2 D6.2 D7.2 D8.2 D9.2 D10.2 D11.2 D14.2 IC1.8 IC1.20 IC1.23 IC1.35 IC1.47 IC2.2 IC3.4 IC3.5 IC3.9 J1.3 J3.5 J3.S1 J3.S2 J3.S3 J3.S4 R5.2 R7.1 R13.1 R20.1 R21.1 R25.1 R26.1 S1.1 S1.2 U1.4 U1.5 U1.6 U1.7 U3.18 U3.31 U3.47 U3.63
LED_STLINK: IC1.30 R15.1 R16.1
NetC5_2: C5.2 R6.2
NetC6_2: C6.2 IC1.5 Y1.2
NetC7_2: C7.2 IC1.6 Y1.1
NetC8_1: C8.1 D12.2 D13.2 IC2.1 IC2.3
NetC19_1: C19.1 R28.2
NetD11_1: D11.1 R15.2
NetD11_3: D11.3 R16.2
NetD14_1: D14.1 R22.1
NetIC1_29: IC1.29 R6.1
NetIC1_39: IC1.39 R12.1 R13.2
NetIC1_44: IC1.44 R7.2
NetJ1_1: J1.1 R5.1
NetJ1_2: J1.2 R8.1
NetJ1_4: J1.4 R9.1
NetJ1_5: J1.5 R10.1
NetJ1_6: J1.6 R11.1
NetJ3_4: J3.4 R21.2
NetQ1_1: Q1.1 R17.1 R18.1 R20.2
NetQ1_2: Q1.2 R19.2
NetR28_1: R28.1 S2.1 S2.2
NRST: C13.1 IC1.18 R10.2 S1.3 S1.4 U3.7
P5V: D12.1 R12.2
PA0: D1.1 U3.14
PA1: D2.1 U3.15
PA2: D3.1 IC1.12 U3.16
PA3: C14.2 D4.1 FB1.1 IC1.13 U3.13 U3.17
PA4: D5.1 U3.20
PA5: D6.1 U3.21
PA6: D7.1 D9.1 U3.22
PA7: D8.1 D10.1 U3.23
PA8: U3.41
PA9: U3.42
PA10: U3.43
PA11: U3.44
PA12: U3.45
PA13: J2.4 U3.46
PA14: J2.2 U3.49
PA15: U3.50
PB0: U3.26
PB1: U3.27
PB2: U3.28
PB3: IC1.31 R11.2 U3.55
PB4: U3.56
PB5: U3.57
PB6: U1.2 U3.58
PB7: R1.1 R2.1 U1.1 U3.59
PB8: R3.1 U1.3 U3.61
PB9: U3.62
PB10: U3.29
PB11: C21.2 U3.30
PB12: U3.33
PB13: U3.34
PB14: U3.35
PB15: U3.36
PC0: U3.8
PC1: U3.9
PC2: U3.10
PC3: U3.11
PC4: U3.24
PC5: U3.25
PC6: U3.37
PC7: U3.38
PC8: U3.39
PC9: U3.40
PC10: U3.51
PC11: U3.52
PC12: U3.53
PC13: C19.2 R27.1 S2.3 S2.4 U3.2
PC14: U3.3
PC15: U3.4
PD2: U3.54
PF0: C20.1 U3.5 Y2.4
PF1: C22.1 U3.6 Y2.1
PWR_ENn: IC1.28 R23.1 U2.4
STM_JTCK: IC1.37
STM_JTMS: IC1.34
STM_RST: IC1.7
T_JTCK: C1.2 C2.2 C3.2 C4.2 C9.1 D11.4 IC1.1 IC1.9 IC1.15 IC1.24 IC1.26 IC1.36 IC1.48 IC2.5 J2.1 Q1.3 R8.2
T_JTDI: IC1.17
T_JTDO: IC1.16
T_JTMS: IC1.27 J2.3 R9.2 R14.1
T_SWDIO_IN: IC1.25 R14.2
U5V: D13.1 J3.1 R17.2
USB_DM: IC1.32 J3.2
USB_DP: IC1.33 J3.3 R19.1
USB_RENUMn: IC1.38 R18.2
VBAT/VLCD: R24.1 U3.1
VCC: R23.2 U2.1 U2.2 U2.3
VDD: C10.1 C11.1 C15.2 C16.2 C17.2 C18.2 C25.2 FB1.2 IC3.1 IC3.2 R1.2 R2.2 R3.2 R24.2 R27.2 U1.8 U3.19 U3.32 U3.48 U3.64
pads on no net: IC1.2 IC1.3 IC1.4 IC1.11 IC1.14 IC1.19 IC1.21 IC1.22 IC1.40 IC1.41 IC1.42 IC1.43 IC1.45 IC1.46 IC2.4 IC3.3 IC3.6 J3. Y2.2 Y2.3

## Text inside footprints (layer, text, board x,y; h text height)
J3: Mechanical 13 "PCB EDGE" at 1087.9,3159.55 h32.02 r270